# Altium PCB practice_0.PcbDoc
Units mm, origin at the board's own origin, x right, y up, seen from the top; angles counter-clockwise.
Board outline 34.35 x 31.65 mm, 4 copper layers (Top Layer, Int1 (GND), Int2 (GND), Bottom Layer), stack 1.57 mm thick; 34 components, 28 nets, 168 pads, 53 vias.
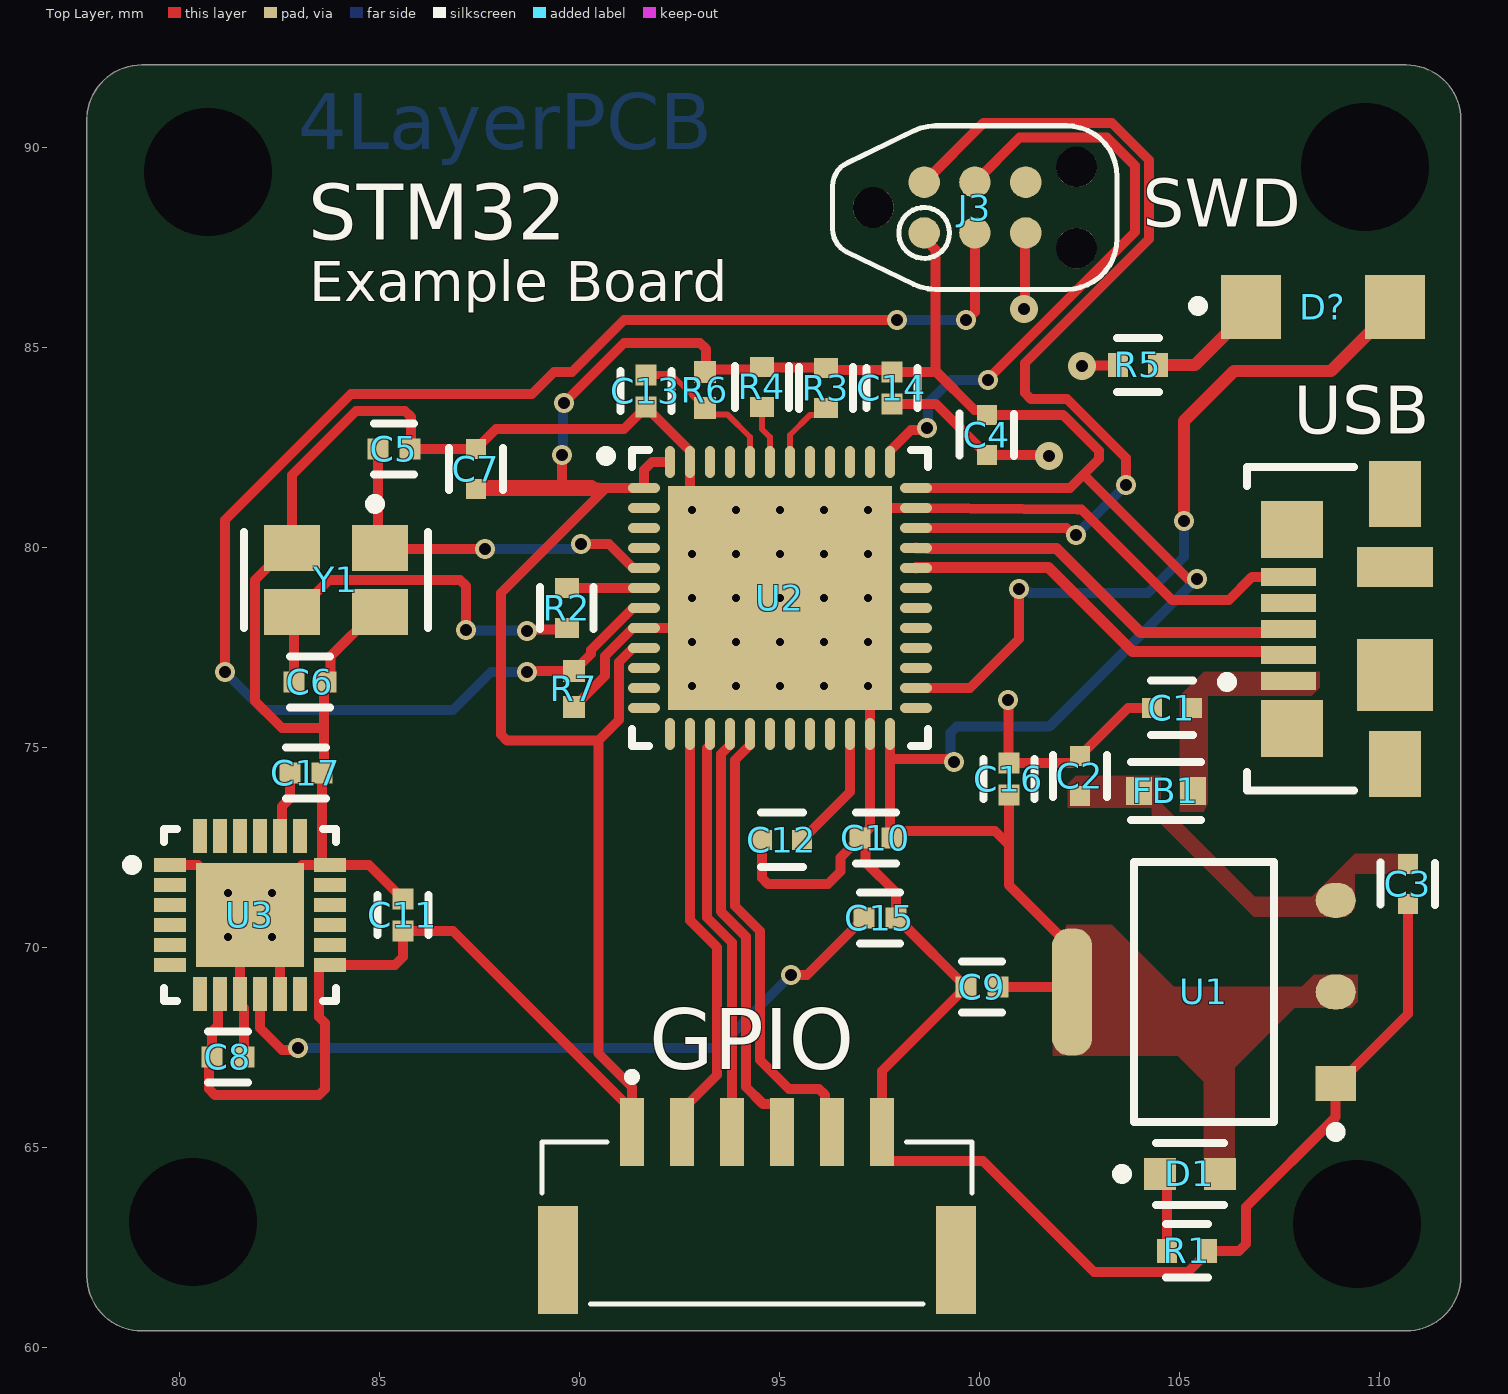
[diagram p0: Top Layer view]
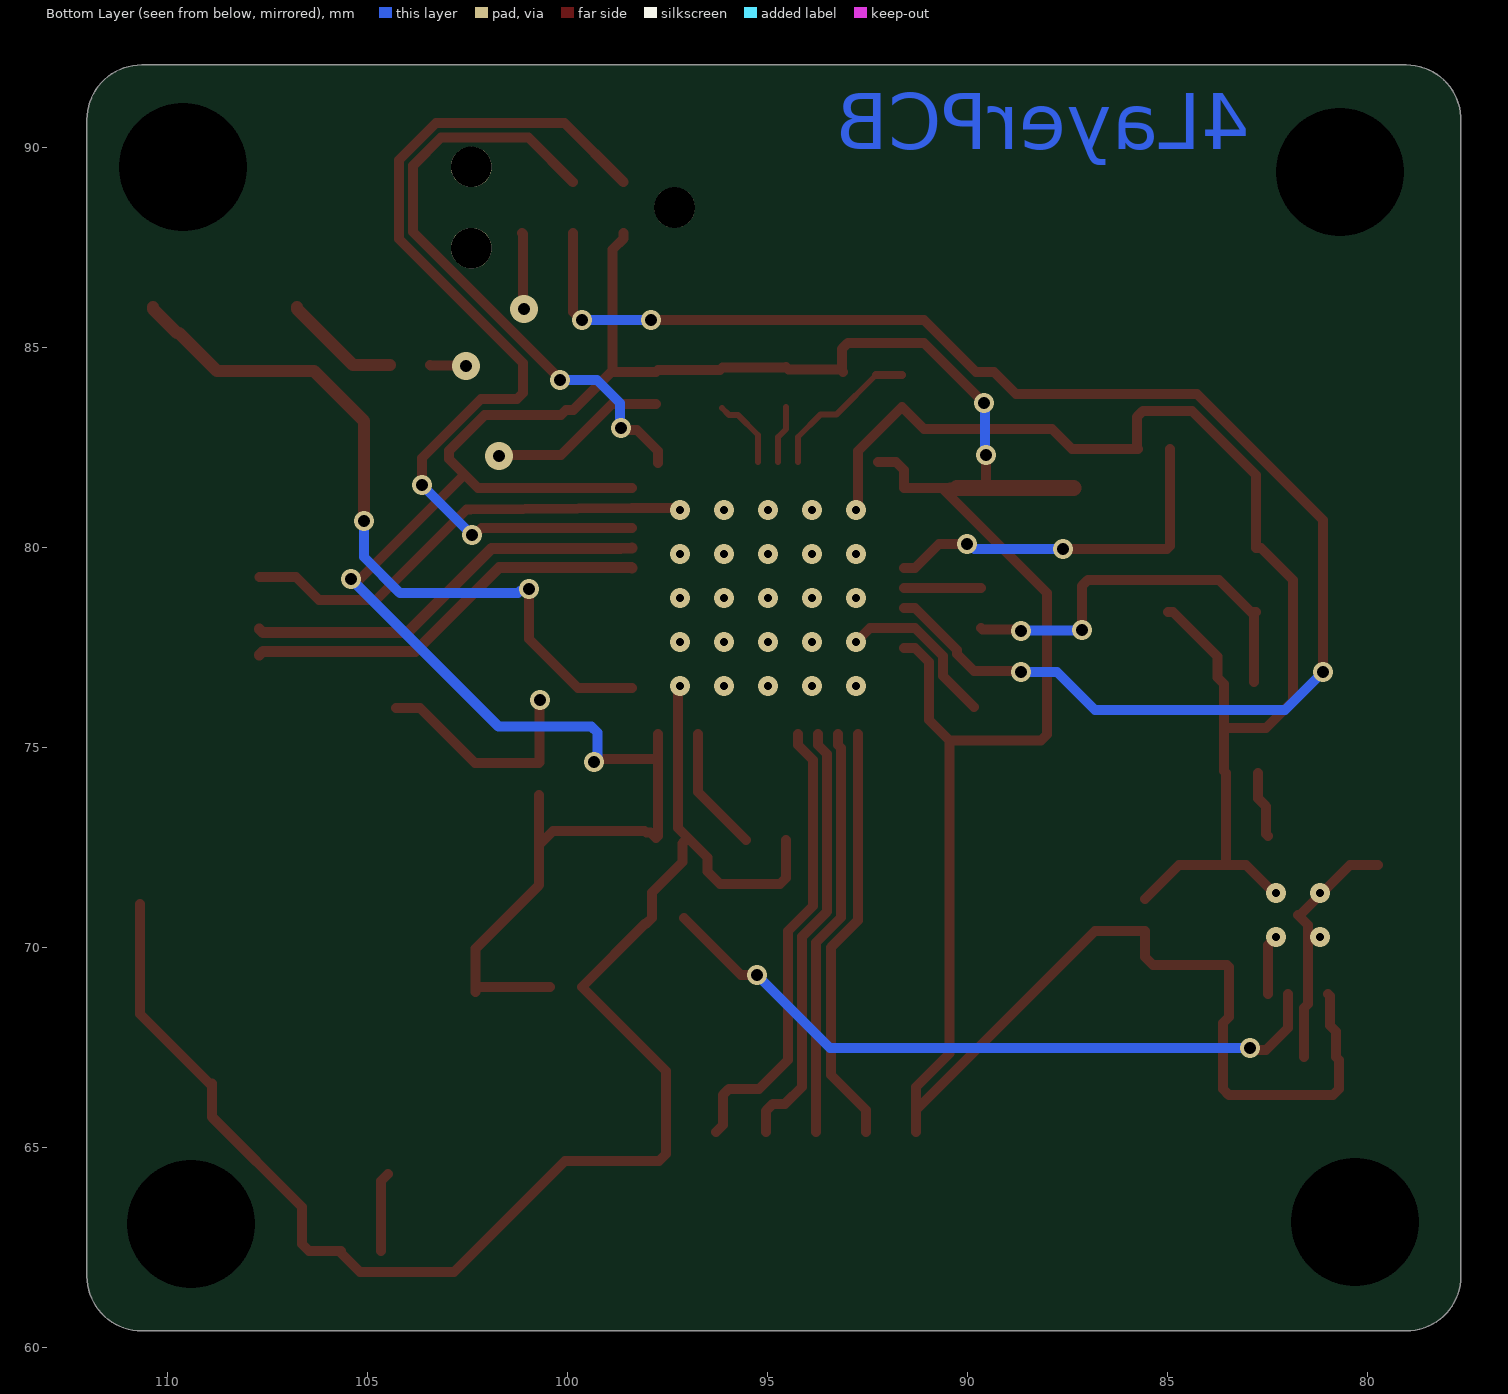
[diagram p1: Bottom Layer view, seen from below]
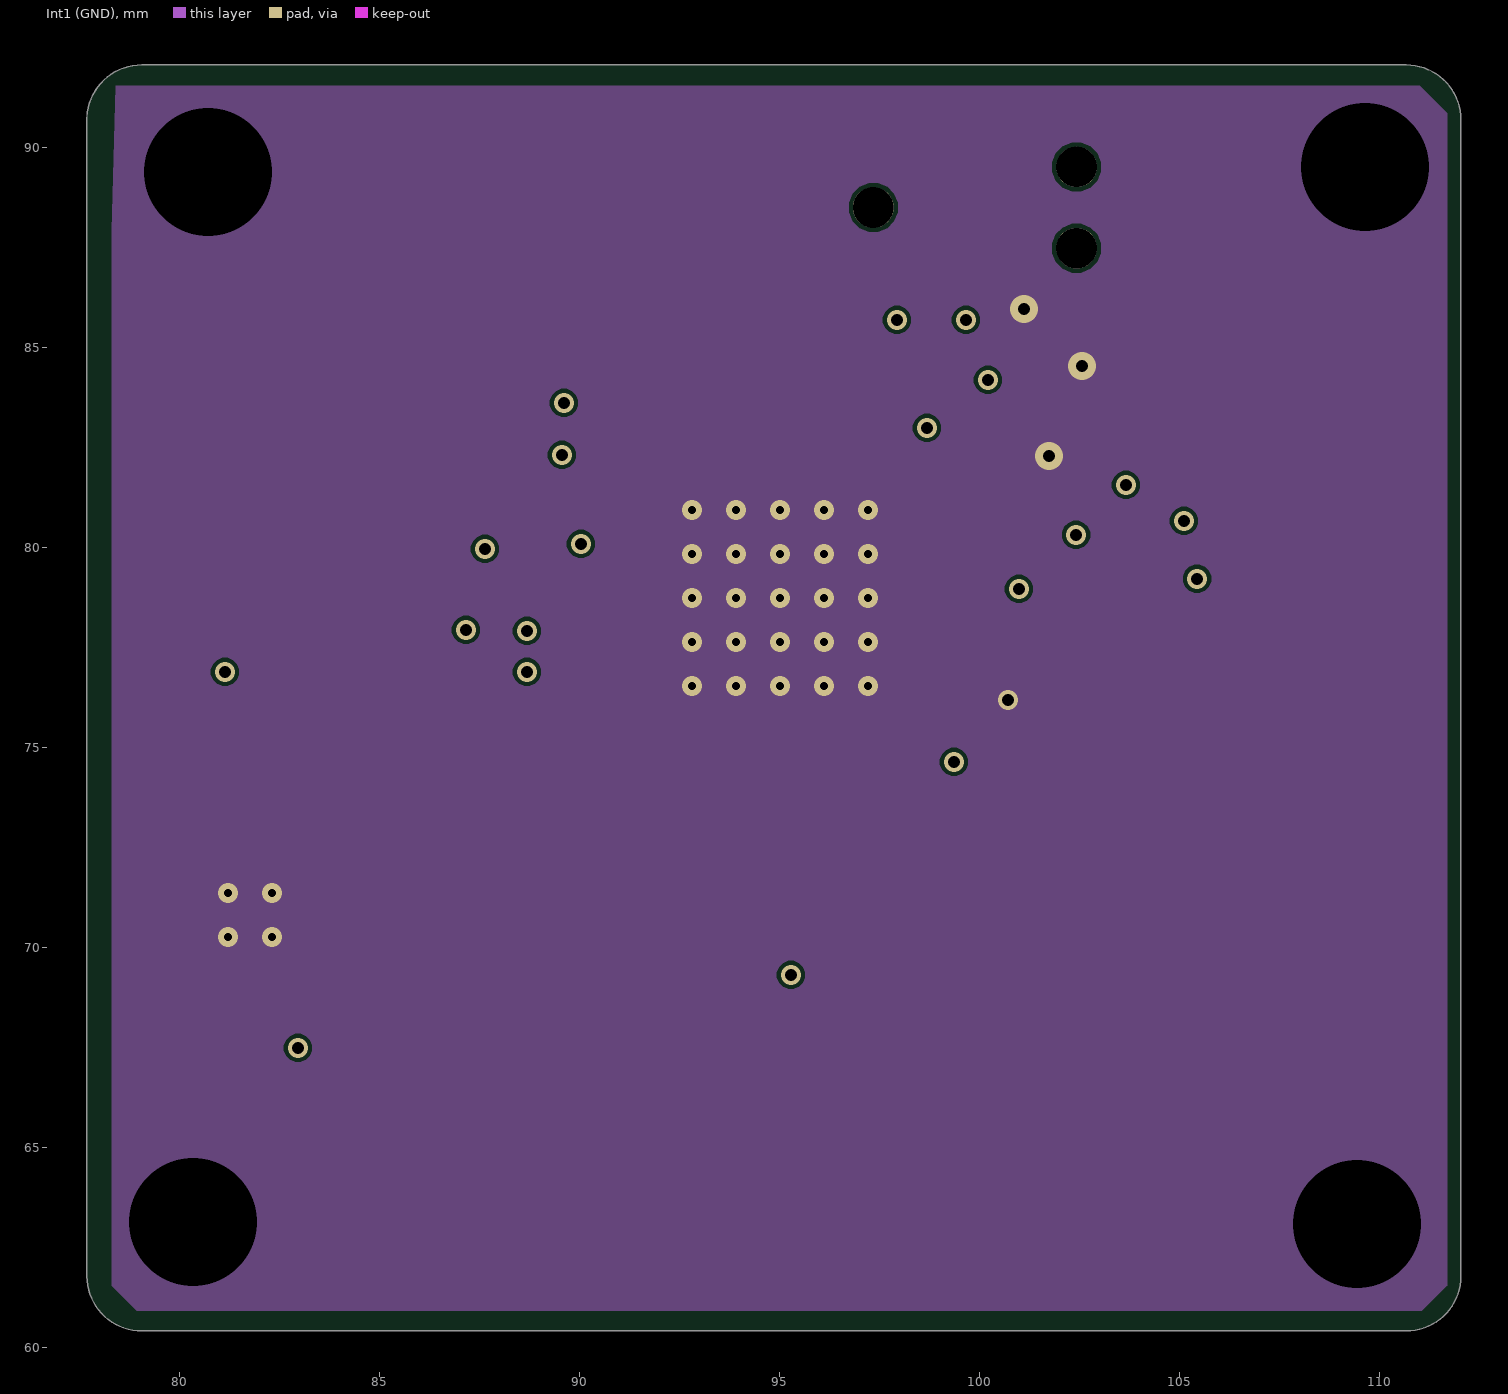
[diagram p2: Int1 (GND)]
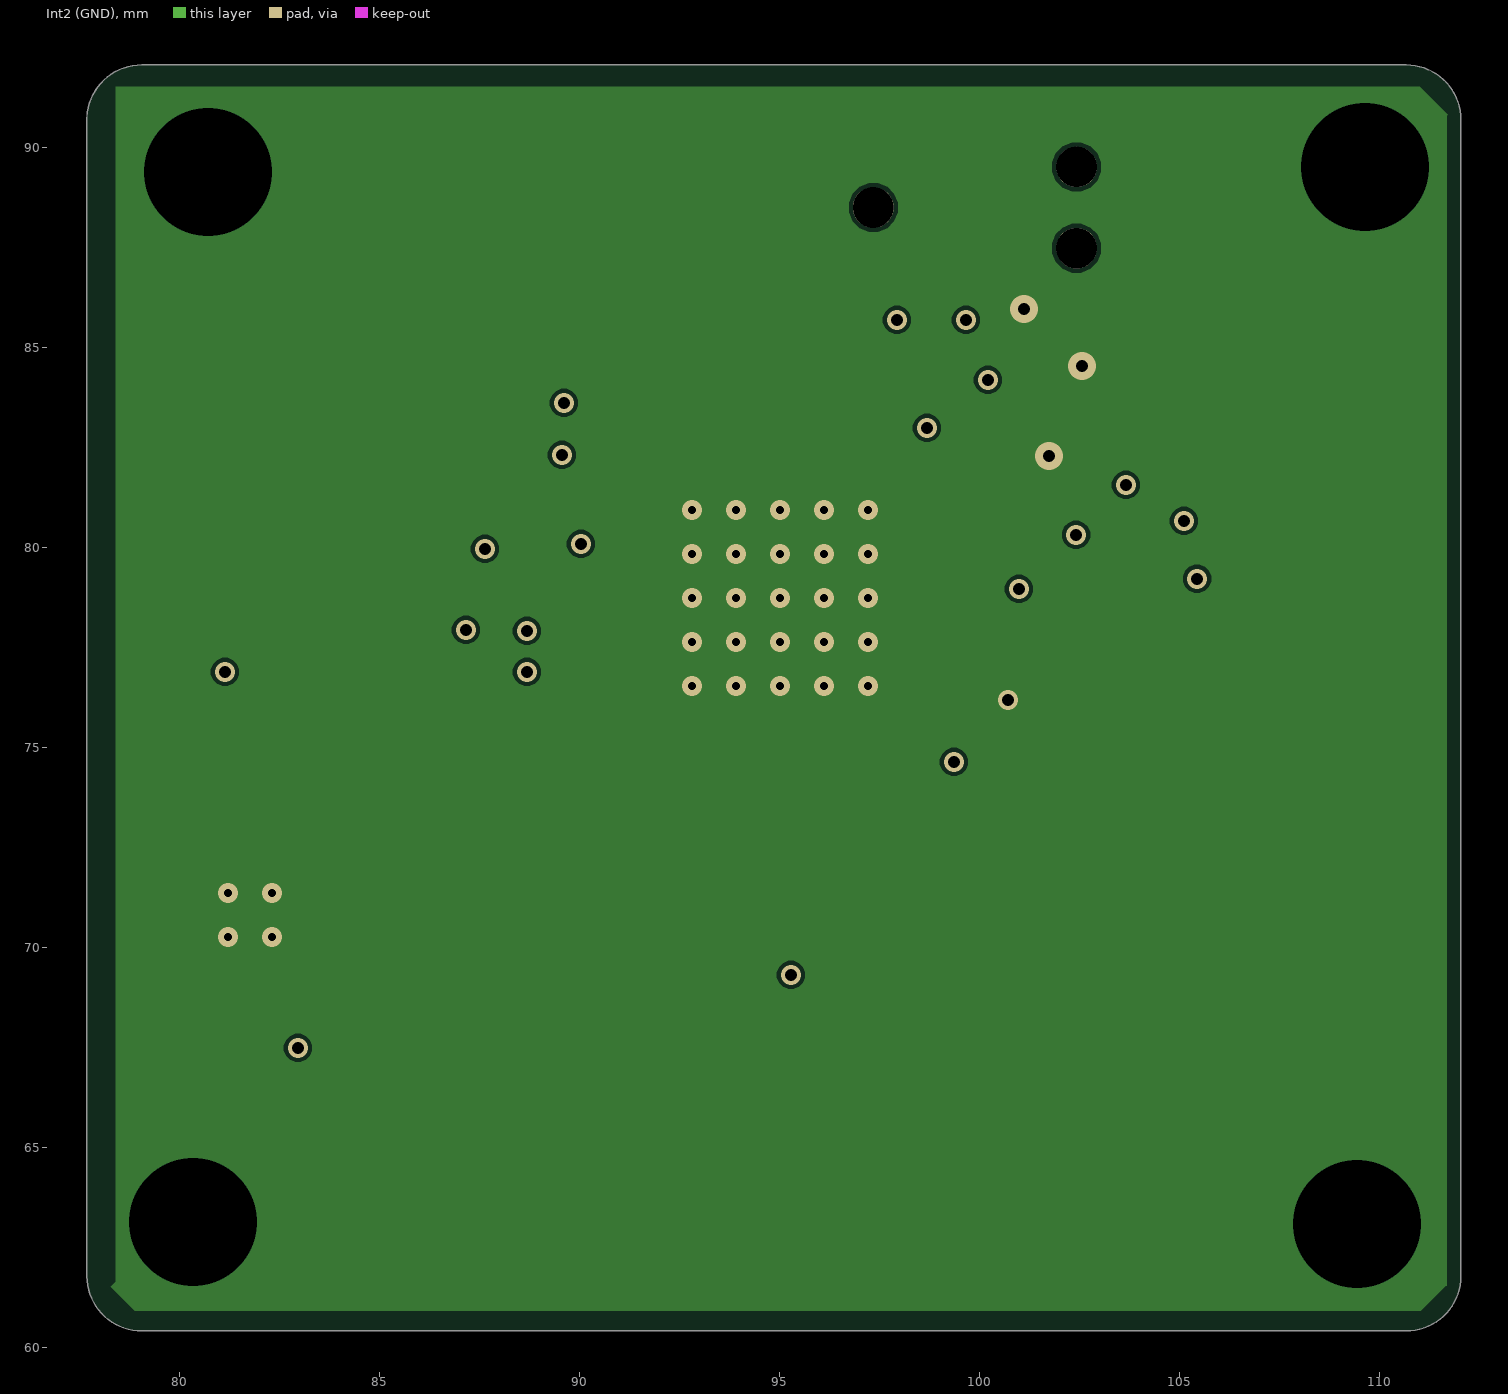
[diagram p3: Int2 (GND)]
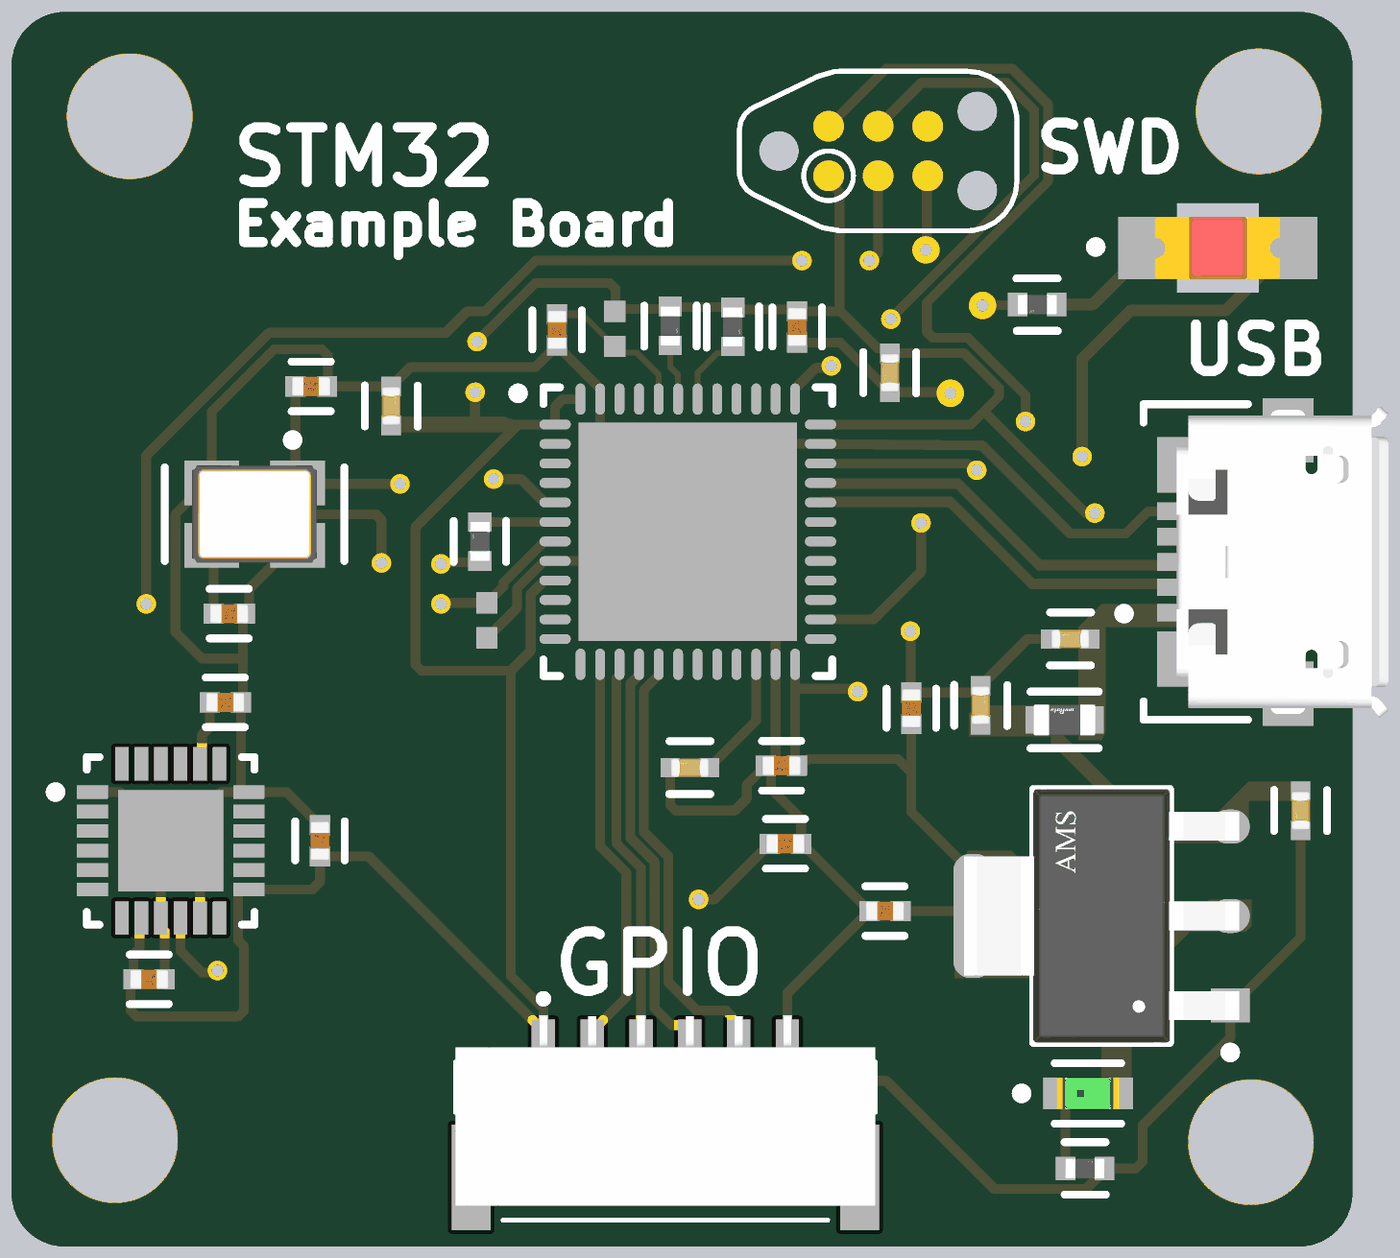
[diagram p4: 3D render of the assembled board from above, using the file's embedded part models]

## Layer stack, top to bottom
Top Solder: solder mask 0.0254, SM-001, Dk 4
Top Layer: signal copper 0.035
Dielectric 1: prepreg 0.2, PP-017, Dk 4.4
Int1 (GND): signal copper 0.0175
Dielectric 2: core 1.065, Core-039, Dk 4.6
Int2 (GND): signal copper 0.0175
Dielectric 3: prepreg 0.2, PP-017, Dk 4.4
Bottom Layer: signal copper 0.035
Bottom Solder: solder mask 0.0254, SM-001, Dk 4

## Board outline
77.675,61.795 ccw(c79.045,61.795) 79.045,60.425 110.655,60.425 ccw(c110.655,61.795) 112.025,61.795 112.025,90.705 ccw(c110.655,90.705) 110.655,92.075 79.045,92.075 ccw(c79.045,90.705) 77.676,90.773 77.675,90.755

## Design rules (kind name [scope] priority, off if disabled: settings)
Clearance [All] p1: gap=0.1 ignorepadtopadclearanceinfootprint=FALSE
DiffPairsRouting [All] p1: maxlimit=0.203 minlimit=0.203 mostfreqgap=0.203 toplayer_mingap=0.203 toplayer_minwidth=0.27 toplayer_maxwidth=0.27 toplayer_prefwidth=0.27 bottomlayer_mingap=0.203 bottomlayer_minwidth=0.27 bottomlayer_maxwidth=0.27 bottomlayer_prefwidth=0.27 impedanceprofiledriven=TRUE impedanceprofileid={82914EE2-84FB-4DEB-938B-AD1E826F180E} impedanceprofilevalue=90.000000 maxuncoupledlength=12.7
HoleSize [All] p1: absolutevalues=TRUE maxlimit=6 minlimit=0.025 maxpercent=80.000 minpercent=20.000
MinimumSolderMaskSliver [All] p1: minsoldermaskwidth=0.05
PolygonConnect [All] p1: connectstyle=Direct reliefconductorwidth=0.254 reliefentries=4 polygonreliefangle="90 Angle" airgapwidth=0.254
RoutingVias [All] p1: holewidth=0.711 width=1.27 viastyle="Through Hole" minholewidth=0.711 minwidth=1.27 maxholewidth=0.711 maxwidth=1.27
SilkToSolderMaskClearance [IsPad] p1: minsilkscreentomaskgap=0.05 clearancetoexposedcopper=TRUE
SolderMaskExpansion [All] p1: expansion=0 istentingtop=FALSE
SupplyNets "Schematic Supply Nets_3" [InNet('VBUS')] p1: voltage=0.000
SupplyNets "Schematic Supply Nets_2" [InNet('+3V3')] p2: voltage=0.000
SupplyNets "Schematic Supply Nets_1" [InNet('GND')] p3: voltage=0.000
SupplyNets "Schematic Supply Nets" [InNet('+5')] p4: voltage=0.000
UnRoutedNet [All] p1: checkbadconnections=TRUE
Width [All] p1: maxlimit=1 minlimit=0.1 preferedwidth=0.3 midlayer1_minwidth=0.254 midlayer1_maxwidth=0.254 midlayer1_prefwidth=0.254 midlayer2_minwidth=0.254 midlayer2_maxwidth=0.254 midlayer2_prefwidth=0.254 bottomlayer_minwidth=0.2 minimp=50.000000 maximp=50.000000 favimp=50.000000
25 further rules are at their usual default settings.

## Classes and differential pairs
differential pair class DIFF_USB: USB_D
differential pair USB_D: +USB_D_P -USB_D_N

## Components (designator, comment, footprint, x,y, rotation, side; value= is the part's Value field where it differs from the comment)
C1 "2u2" FP-CC0402-CC-MFG 104.8,76 r180 top
C2 "2u2" FP-CC0402-CC-MFG 102.5,74.3 r90 top
C3 "22u" FP-CC0402-CC-MFG 110.7,71.6 r270 top
C4 "22u" FP-CC0402-CC-MFG 100.175,82.825 r270 top
C5 "100uf" FP-C0402-BB-MFG 85.35,82.475 r0 top value="330 pF"
C6 "100uf" FP-C0402-BB-MFG 83.25,76.65 r0 top value="330 pF"
C7 "2.2uf" FP-CC0402-CC-MFG 87.4,81.975 r90 top
C8 "100uf" FP-C0402-BB-MFG 81.2,67.275 r0 top value="330 pF"
C9 "100uf" FP-C0402-BB-MFG 100.05,69.025 r180 top value="330 pF"
C10 "100uf" FP-C0402-BB-MFG 97.4,72.75 r180 top value="330 pF"
C11 "100uf" FP-C0402-BB-MFG 85.575,70.825 r90 top value="330 pF"
C12 "2.2uf" FP-CC0402-CC-MFG 95.05,72.7 r180 top
C13 "100uf" FP-C0402-BB-MFG 91.65,83.925 r270 top value="330 pF"
C14 "100nf" FP-C0402-BB-MFG 97.8,84 r270 top value="330 pF"
C15 "100uf" FP-C0402-BB-MFG 97.5,70.75 r0 top value="330 pF"
C16 "100uf" FP-C0402-BB-MFG 100.725,74.225 r90 top value="330 pF"
C17 "100uf" FP-C0402-BB-MFG 83.15,74.375 r0 top value="330 pF"
D1 "G" FP-LTST-C193KGKT-5A-MFG 105.25,64.35 r0 top
D? "R" FP-LTST-C230EKT-MFG 108.575,86.025 r0 top
FB1 "120R" FP-BLM18-0_15-t0_8-MFG 104.65,73.925 r180 top
GPIO "SM06B-GHS-TB" JST_SM06B-GHS-TB 94.425,63.525 r0 top (schematic designator J2)
J3 "SWD" TC2030-IDC-NL 99.875,88.51 r0 top
R1 "1k" FP-CSR0402-MFG 105.175,62.425 r0 top
R2 "" FP-CSR0402-MFG 89.675,78.5 r90 top
R3 "1k" FP-CSR0402-MFG 96.15,84 r270 top
R4 "1k" FP-CSR0402-MFG 94.55,84.025 r270 top
R5 "1k" FP-CSR0402-MFG 103.95,84.575 r180 top
R6 "10k" RESC1005X40X20NL05T10 93.125,83.95 r90 top
R7 "10k" RESC1005X40X20NL05T10 89.85,76.475 r90 top
U1 "AMS1117-3.3" FP-AMS1117-IPC_C 105.6,68.9 r180 top
U2 "STM32F411CEU6" STM-UFQFPN48_L 95,78.75 r0 top
U3 "MPU-6050" IS-QFN-24_V 81.75,70.825 r0 top
USB "473460001" FP-473460001-MFG 110.025,77.975 r90 top (schematic designator J1)
Y1 "24M" FP-TSX-3225-MFG 83.9,79.2 r180 top

## Footprints (in the part's own frame and the unit in brackets; to place one, negate y for a bottom-side part, rotate by r counter-clockwise, add the part's x,y. Pads: shape width x height; smd on the part's side, far side on the other; paste and mask are expansions set on the pad)
FP-473460001-MFG [mm]
  rect 0.45x1.38 smd paste+0 mask+0: 1(-1.3,2.31) 2(-0.65,2.31) 3(0,2.31) 4(0.65,2.31) 5(1.3,2.31)
  rect 1.425x1.55 smd paste+0 mask+0: 6(-2.488,2.225) 7(2.488,2.225)
  rect 1.65x1.3 smd paste+0 mask+0: 8(-3.375,-0.35) 11(3.375,-0.35)
  rect 1.8x1.9 smd paste+0 mask+0: 9(-1.15,-0.35)
  rect 1x1.9 smd paste+0 mask+0: 10(1.55,-0.35)
  silkscreen extent -4.05,0.67 4.05,3.97, body extent -4.3,-2.48 4.3,3.45, height 0.25
FP-AMS1117-IPC_C [mm]
  rect 1.004x0.872 smd paste+0 mask+0: 1(-3.295,2.29)
  rrect100% 1.004x0.872 smd paste+0 mask+0: 2(-3.295,0) 3(-3.295,-2.29)
  rrect87% 1.004x3.182 smd paste+0 mask+0: 4(3.295,0)
  silkscreen extent -3.42,-3.25 1.75,3.62, body extent -3.9,-3.35 3.9,3.35, height 0.25
FP-BLM18-0_15-t0_8-MFG [mm]
  rect 0.65x0.7 smd paste+0 mask+0: 1(-0.675,0) 2(0.675,0)
  silkscreen extent -0.87,-0.72 0.87,0.72, body extent -1.1,-0.58 1.1,0.58, height 0.25
FP-C0402-BB-MFG [mm]
  rect 0.52x0.52 smd paste+0 mask+0: 1(-0.4,0) 2(0.4,0)
  silkscreen extent -0.5,-0.64 0.5,0.64, body extent -0.8,-0.4 0.8,0.4, height 0.25
FP-CC0402-CC-MFG [mm]
  rect 0.5x0.5 smd paste+0 mask+0: 1(-0.5,0) 2(0.5,0)
  silkscreen extent -0.53,-0.68 0.53,0.67, body extent -0.95,-0.55 0.95,0.55, height 0.25
FP-CSR0402-MFG [mm]
  rect 0.5x0.6 smd paste+0 mask+0: 1(-0.5,0) 2(0.5,0)
  silkscreen extent -0.53,-0.67 0.53,0.67, body extent -0.85,-0.4 0.85,0.4, height 0.25
FP-LTST-C193KGKT-5A-MFG [mm]
  rect 0.8x0.8 smd paste+0 mask+0: 1(-0.75,0) 2(0.75,0)
  silkscreen extent -1.82,-0.77 0.85,0.77, body extent -1.25,-0.55 1.25,0.55, height 0.25
FP-LTST-C230EKT-MFG [mm]
  rect 1.5x1.6 smd paste+0 mask+0: 1(-1.8,0) 2(1.8,0)
  silkscreen extent -3.25,-0.1 -3,0.15, body extent -2.65,-0.95 2.65,0.95, height 0.25
FP-TSX-3225-MFG [mm]
  rect 1.4x1.15 smd paste+0 mask+0: 1(-1.1,-0.8) 2(1.1,-0.8) 3(1.1,0.8) 4(-1.1,0.8)
  silkscreen extent -2.3,-2.02 2.3,1.2, body extent -1.9,-1.48 1.9,1.48, height 0.25
IS-QFN-24_V [mm] "QFN, 24-Leads, Body 4x4mm, Pitch 0.5mm, Thermal Pad 2.7x2.6mm"
  rect 0.8x0.35 smd: 1(-2,1.25) 2(-2,0.75) 3(-2,0.25) 4(-2,-0.25) 5(-2,-0.75) 6(-2,-1.25) 13(2,-1.25) 14(2,-0.75) 15(2,-0.25) 16(2,0.25) 17(2,0.75) 18(2,1.25)
  rect 0.35x0.85 smd mask+0.102: 7(-1.25,-1.975) 8(-0.75,-1.975) 9(-0.25,-1.975) 10(0.25,-1.975) 11(0.75,-1.975) 12(1.25,-1.975) 19(1.25,1.975) 20(0.75,1.975) 21(0.25,1.975) 22(-0.25,1.975) 23(-0.75,1.975) 24(-1.25,1.975)
  rect 2.7x2.6 smd: 25(0,0)
  silkscreen extent -3.07,-2.15 2.15,2.15, body extent -2,-2 2,2, height 0.95
JST_SM06B-GHS-TB [mm]
  rect 0.6x1.7 smd paste+0 mask+0.102: 1(-3.125,1.875) 2(-1.875,1.875) 3(-0.625,1.875) 4(0.625,1.875) 5(1.875,1.875) 6(3.125,1.875)
  rect 1x2.7 smd paste+0 mask+0.102: MP1(-4.975,-1.325) MP2(4.975,-1.325)
  silkscreen extent -5.38,-2.42 5.38,3.35, body extent -5.38,-2.05 5.38,2.8, height 4.25
RESC1005X40X20NL05T10 [mm] "Chip Resistor, 2-Leads, Body 1.00x0.50mm, IPC Medium Density"
  rect 0.55x0.55 smd: 1(-0.45,0) 2(0.45,0)
  body extent -0.53,-0.27 0.53,0.28, height 0.4
STM-UFQFPN48_L [mm] "QFN, 48-Leads, Body 7.1x7.1mm, Pitch 0.5mm, Thermal Pad 5.6x5.6mm, IPC High Density"
  oval 0.8x0.25 smd: 1(-3.4,2.75) 2(-3.4,2.25) 3(-3.4,1.75) 4(-3.4,1.25) 5(-3.4,0.75) 6(-3.4,0.25) 7(-3.4,-0.25) 8(-3.4,-0.75) 9(-3.4,-1.25) 10(-3.4,-1.75) 11(-3.4,-2.25) 12(-3.4,-2.75) 25(3.4,-2.75) 26(3.4,-2.25) 27(3.4,-1.75) 28(3.4,-1.25) 29(3.4,-0.75) 30(3.4,-0.25) 31(3.4,0.25) 32(3.4,0.75) 33(3.4,1.25) 34(3.4,1.75) 35(3.4,2.25) 36(3.4,2.75)
  oval 0.25x0.8 smd: 13(-2.75,-3.4) 14(-2.25,-3.4) 15(-1.75,-3.4) 16(-1.25,-3.4) 17(-0.75,-3.4) 18(-0.25,-3.4) 19(0.25,-3.4) 20(0.75,-3.4) 21(1.25,-3.4) 22(1.75,-3.4) 23(2.25,-3.4) 24(2.75,-3.4) 37(2.75,3.4) 38(2.25,3.4) 39(1.75,3.4) 40(1.25,3.4) 41(0.75,3.4) 42(0.25,3.4) 43(-0.25,3.4) 44(-0.75,3.4) 45(-1.25,3.4) 46(-1.75,3.4) 47(-2.25,3.4) 48(-2.75,3.4)
  rect 5.6x5.6 smd: 49(0,0)
  silkscreen extent -4.47,-3.7 3.7,3.7, body extent -3.55,-3.55 3.55,3.55, height 0.6
TC2030-IDC-NL [mil]
  round 31 smd paste-39.37: 1(-50,-25) 2(-50,25) 3(0,-25) 4(0,25) 5(50,-25) 6(50,25)
  round 40 hole 40 unplated: ""(-100,0) ""(100,-40) ""(100,40)
  silkscreen extent -140,-81 140,80

## Part data
C1 C2 C3 C4 C7 C12: library part CMP-03422-000732-3, "CAP CER 2.2UF 16V X5R 0402", Capacitance=2.2uF, Case Code (Imperial)=0402, Case Code (Metric)=1005, Dielectric=X5R, Max Operating Temperature=85°C, Min Operating Temperature=-55°C, Package Quantity=5000, Tolerance=10%, Voltage Rating=16V, Case/Package=0402, Halogen Free="Halogen Free", Height=0.5mm, Lead Free="Lead Free", Length=0.039inch, Mount="Surface Mount", Packaging="Tape and Reel", RoHS Compliant=Yes, Termination=SMD/SMT, Thickness=0.022inch, Voltage Rating (DC)=16V, Weight=2.3E-05oz, Width=0.5mm
C5 C6 C8 C9 C10 C11 C13 C14 C15 C16 C17: library part CMP-1034-01425-3, "Capacitor, Ceramic, 330Pf, 16Vdc, 10-% Tol, 10+% Tol, X7r-Tc Code, -15, 15%-Tc Rohs Compliant: Yes", Capacitance="330 pF", Manufacturer=Kemet, Manufacturer Part Number=C0402C331K4RACTU, Package=C0402-BB, Temperature="-55°C to +125°C", Temperature Characteristic=X7R, Temperature Coefficient=15%, Temperature Range High=+125°C, Temperature Range Low=-55°C, Tolerance=0.1, Voltage Rating="16 V", Automotive=No, Category=Cap, ComponentLink2Description=Datasheet, ComponentLink2URL=https://content.kemet.com/datasheets/KEM_C1002_X7R_SMD.pdf, Device Class L1="Passive Components", Device Class L2=Capacitors, Device Class L3="Ceramic Capacitors", Digikey Description="Capacitor, Ceramic, 330Pf, 16Vdc, 10-% Tol, 10+% Tol, X7r-Tc Code, -15, 15%-Tc Rohs Compliant: Yes", Height=0.55mm, Ipc Land Pattern Name=CAPC10050X50, Lead Free=Yes, Material=Ceramic, Mouser Description="Multilayer Ceramic Capacitors MLCC - SMD/SMT 16volts 330pF X7R 10%", Octopart=https://octopart.com/c0402c331k4ractu-kemet-9139363, RoHS=TRUE
D1: library part CMP-2000-06622-2, "LED GREEN CLEAR CHIP SMD", Case Code (Imperial)=0603, Case Code (Metric)=1608, Color=Green, Forward Current=30mA, Forward Voltage=2.3V, Lens Color=Colorless, Max Operating Temperature=85°C, Min Operating Temperature=-55°C, Package Quantity=3000, Power Dissipation=75mW, Reverse Voltage=5V, Test Current=5mA, Case/Package=0603, Depth=0.8mm, Dominant Wavelength=576.5nm, Height=0.35mm, Illumination Color=Green, Lead Free="Lead Free", Length=1.6mm, Lens Style=Diffused, Lens Transparency=Clear, Luminous Intensity=28mcd, Mount="Surface Mount", Number of Elements=1, Number of LEDs=1, Number of Pins=2, Packaging="Tape and Reel", Power Rating=75mW, Radiation Hardening=No, Viewing Angle=130°, Width=0.8mm
D?: library part CMP-22017-000030-1, "LED RED CLEAR CHIP SMD", Case Code (Imperial)=1206, Case Code (Metric)=3216, Color=Red, Forward Current=30mA, Forward Voltage=2V, Lens Color=Colorless, Max Operating Temperature=85°C, Min Operating Temperature=-55°C, Package Quantity=1, Power Dissipation=100mW, Reverse Voltage=5V, Test Current=10mA, Case/Package=1206, Depth=1.6mm, Dominant Wavelength=621nm, Height=1.1mm, Illumination Color=Red, Lead Free="Lead Free", Length=3.2mm, Lens Style=Diffused, Lens Transparency=Clear, Luminous Intensity=6mcd, Mount="Surface Mount", Number of Elements=1, Number of LEDs=1, Number of Pins=2, Packaging="Tape and Reel", Power Rating=100mW, Radiation Hardening=No, Viewing Angle=130°, Wavelength=630nm, Width=1.6mm
FB1: library part CMP-0686-00380-3, "Chip Ferrite Bead, 0603, 120Ω @ 100MHz, 0.5Ω, 25%, 200mA", Case Code (Imperial)=0603, Case Code (Metric)=1608, Current Rating=200mA, DC Resistance (DCR)=500mR, Max Operating Temperature=125°C, Min Operating Temperature=-55°C, Package Quantity=4000, Test Frequency=100MHz, Tolerance=25%, Case/Package=0603, Core Material=Ferrite, DC Current=200mA, Depth=0.95mm, Height=0.8mm, Impedance=120R, Lead Free="Lead Free", Length=1.6mm, Material=Steel, Max Current Rating=200mA, Max DC Current=200mA, Number of Circuits=1, Number of Lines=1, Number of Pins=2, Packaging="Tape and Reel", Radiation Hardening=No, REACH SVHC="No SVHC", Resistance=500mR, Series=BLM18H, Shielding=Unshielded, Termination=SMD/SMT, Weight=7.1E-05oz, Width=0.8mm
GPIO: "Connector Header Surface Mount, Right Angle 6 position 0.049 (1.25mm)", Package=None, Check_prices=https://www.snapeda.com/parts/SM06B-GHS-TB/JST/view-part/?ref=eda, MF="JST Sales", MP=SM06B-GHS-TB, SnapEDA_Link=https://www.snapeda.com/parts/SM06B-GHS-TB/JST/view-part/?ref=snap
J3: library part TC2030-CTX, "CortexÂ® Plug-Of-Nailsâ„¢ Adapter Cable", Package=None, Availability=Unavailable, MF="Tag-Connect LLC", MP=TC2030-CTX, Price=None, SnapEDA_Link=https://www.snapeda.com/parts/TC2030-CTX/Tag-Connect%20LLC/view-part/225831/?ref=snap
R1 R2 R3 R4 R5: library part CMP-26527-006296-1, "General Purpose Thick Film Chip Resistor, 0402, 0.5Ω, 5%, 200ppm/°C, 0.125W", Max Operating Temperature=155°C, Min Operating Temperature=-55°C, Tolerance=5%, Mount="Surface Mount", Packaging="Tape and Reel", RoHS Compliant=Yes
R6 R7: library part CMP-2002-01682-1, Manufacturer="Vishay BCcomponents", Part Number=TNPW040210K0DEED
U1: library part CMP-209535-000001-1, "LDO Voltage Regulators 1A, 3.3V", Dropout Voltage=1.1V, Manufacturer="Advanced Monolithic Systems", Max Junction Temp=+125°C, Max Power Dissipation=1.2W, Max Supply Voltage=15V, Nominal Supply Current=5mA, Output Current=1A, Output Voltage=3.3V, Package=AMS1117, Temperature="-40°C to +125°C", Temperature Range Low=-40°C, Automotive=No, Category=IC, ComponentLink2Description=Datasheet, ComponentLink2URL=http://www.advanced-monolithic.com/pdf/ds1117.pdf, Device Class L1="Integrated Circuits (ICs)", Device Class L2="Power Management ICs", Device Class L3="Voltage Regulators - Linear", Height=1.8mm, Ipc Land Pattern Name=SOT229P700X180-4, Lead Free=Yes, Manufacturer Part Number=AMS1117-3.3, Number of Outputs=1, Octopart=https://octopart.com/ams1117-3.3-advanced+monolithic+systems-25899300, Output Type=Fixed, RoHS=TRUE, Standoff Height=0.64mm, Temperature Range High=+125°C
U2: library part CMP-0243-00165-1, "ARM Cortex-M4 32-bit MCU+FPU, 512 KB Flash, 128 KB RAM, 36 I/Os, 48-Pin UFQFPN, -40 to 85 degC, Tray", I/Os (High Current)=36, Operating Frequency(F) (Processor speed) (MHz)=100, Package Description=UFQFPN48, Package Reference="48-Pin Ultra Thin Fine Pitch Quad Flat No-Lead, 7 x 7 x 0.6 mm Body, 0.5 mm Pitch, Exposed Pad", Supply Voltage(Vcc) min (V)=1.7, ComponentLink1Description="Manufacturer URL", ComponentLink1URL=http://www.st.com/, ComponentLink2Description=Datasheet, ComponentLink2URL=http://www.st.com/st-web-ui/static/active/en/resource/technical/document/datasheet/DM00115249.pdf, Core="ARM Cortex-M4", DatasheetVersion="Rev. 6", FLASH Size (Prog) (kB)=512, Internal RAM Size (kB)=128, Mounting Technology="Surface Mount", Packing=Tray
U3: library part CMP-1753-00002-2, "3-Axis Gyroscope, Accelerometer and a Digital Motion Processor(TM) (DMP), 2.375 to 3.46 V, -40 to 85 degC, 24-Pin QFN, RoHS, Tape and Reel", Manufacturer=InvenSense, Standard Package=5,000, Category=Sensors,Transducers, Datasheet URL=http://datasheet.octopart.com/MPU-6050-InvenSense-datasheet-14421344.pdf, Datasheet Version="Rev. 3.3, 05/2012", Dynamic Catalog=MPU-6000™Series, Family=Multifunction, Featured Product=MPU-60506-Axis,IntegratedI²CSolution, Manufacturer URL=http://www.invensense.com/, Online Catalog=MPU-6000™Series, Other Names="1428-1007-2 / MPU6050", Output Type=Digital, Sensor Type=MotionTracking, Unit PriceUSD=Digital
USB: library part CMP-2000-05246-2, "CONN RCPT USB2.0 MICRO B SMD R/A", Current Rating=1.8A, Manufacturer=Molex, Package=0, Temperature="-30°C to +85°C", Temperature Range High=+85°C, Temperature Range Low=-30°C, Voltage Rating=30V, Automotive=No, Category=Conn, ComponentLink2Description=Datasheet, ComponentLink2URL=https://www.molex.com/webdocs/datasheets/pdf/en-us/0473460001_IO_CONNECTORS.pdf, Conn Orientation="Right Angle", Contact Material=Gold,Nickel, Device Class L1=Connectors, Device Class L2="USB Connectors", Device Class L3=unset, Digikey Description="CONN RCPT USB2.0 MICRO B SMD R/A", Footprint Url=https://www.molex.com/pdm_docs/sd/473460001_sd.pdf, Height=2.945mm, Is Female=yes, Lead Free=Yes, Manufacturer Part Number=473460001, Number of Contacts=5, Octopart=https://octopart.com/47346-0001-molex-7164928, Pitch=0.65mm, RoHS=TRUE, Shielding=true, Usb Standard="USB 2.0"
Y1: library part CMP-36405-000018-1, "CRYSTAL 24.0000MHZ 9PF SMD", Case/Package=SMD/SMT, ESR (Equivalent Series Resistance)=40R, Frequency=24MHz, Frequency Stability=20ppm, Frequency Tolerance=10ppm, Load Capacitance=9pF, Max Operating Temperature=105°C, Min Operating Temperature=-40°C, Package Quantity=250, Depth=2.5mm, Drive Level=200uW, Height=0.024inch, Lead Free="Lead Free", Length=3.2mm, Mount="Surface Mount", Number of Pins=4, Packaging="Tape and Reel", RoHS Compliant=Yes, Series=TSX-3225, Termination=SMD/SMT, Tolerance=10ppm, Weight=0.000564oz, Width=2.5mm

## Free pads (board coordinates)
  round 1.524 hole 3.2: MH(80.325,63.15) MH(80.7,89.4) MH(109.425,63.1) MH(109.625,89.525)

## Via types
v1: diameter 0.5, hole 0.2, Top Layer to Bottom Layer, 29 vias
v2: diameter 0.5, hole 0.3, Top Layer to Bottom Layer, 21 vias
v3: diameter 0.7, hole 0.3, Top Layer to Bottom Layer, 3 vias

## Nets (pads, with @x,y where several pads share a name; then routed paths per layer and width w, separated by ;. In a path a pad name is that pad's centre, name@x,y a point inside that pad or via, vN(x,y) a via of type N, cw(c..) or ccw(c..) an arc to the next point about the centre after c; other vN are vias at no path point)
+3V3: C4.1 C7.1 C8.1 C9.1 C10.1 C11.1 C14.1 C16.1 D1.2 GPIO.1 J3.1 R3.1 R4.1 R6.2 U1.2 U1.4 U2.1 U2.9 U2.24 U2.36 U2.48 U3.8 U3.13 | length 100.9
  Top Layer w0.25: U3.8 80.95,68.8 80.95,68.06 80.8,67.91 C8.1 80.725,67.2 80.725,66.471 80.871,66.325 83.479,66.325 83.625,66.471 83.625,68.125 83.475,68.275 83.475,69.525 83.525,69.575 U3.13 85.375,69.575 85.575,69.775 C11.1 86.825,70.425 GPIO.1@91.3,65.95 ; 89.525,81.5 89.55,81.525 v2(89.55,82.325) ; v2(89.6,83.625) 91.1,85.125 93.004,85.125 93.15,84.979 R6.2@93.15,84.425 ; 90.45,81.5 90.65,81.5 ; GPIO.1 GPIO.1@91.3,65.95 ; U2.9 91.325,77.5 90.975,77.15 90.975,75.7 90.463,75.188 ; U2.48 91.8,82.15 91.6,81.95 U2.1 90.65,81.5 ; R6.2 R6.2@93.15,84.425 ; U2.24 97.75,74.725 ; U2.36 102.25,81.5 102.588,81.838 ; J3.1 98.605,87.739 98.884,87.46 98.884,84.432 ; v2(99.35,74.65) 99.275,74.725 97.75,74.725 ; C9.1 U1.4@102.18,69.025 ; C16.1 100.725,72.575 ; U1.4 102.305,69.989 100.725,71.569 100.725,72.575 ; v2(105.428,79.228) 105.425,79.225 105.2,79.225 102.588,81.838 ; 90.463,75.188 88.171,75.188 88.025,75.334 88.025,78.875 90.65,81.5 ; 90.463,75.188 90.463,67.362 91.3,66.525 GPIO.1@91.3,65.95 ; R6.2@93.15,84.425 93.187,84.463 94.487,84.463 R4.1 94.563,84.512 96.138,84.512 R3.1 96.2,84.45 97.75,84.45 C14.1 98.884,84.4 98.884,84.432 ; 97.75,74.725 97.75,72.8 C10.1 97.935,72.885 98.041,72.885 98.081,72.925 100.375,72.925 100.725,72.575 ; 98.884,84.432 99.866,83.45 100.05,83.45 C4.1 102.08,83.325 102.974,82.431 102.974,82.224 102.588,81.838
  Top Layer w0.28: 90.275,81.5 90.45,81.5
  Top Layer w0.4: C7.1@87.363,81.5 89.525,81.5 90.275,81.5
  Bottom Layer w0.25: v2(89.55,82.325) 89.575,82.35 89.575,83.6 v2(89.6,83.625) ; v2(99.35,74.65) 99.264,74.736 99.264,75.386 99.41,75.532 101.732,75.532 v2(105.428,79.228)
+5: C2.1 C3.1 FB1.2 U1.3
GND: C1.2 C2.2 C3.2 C4.2 C5.2 C6.2 C7.2 C8.2 C9.2 C10.2 C11.2 C12.2 C13.2 C14.2 C15.2 C16.2 C17.2 GPIO.6 J3.5 pad.MH R1.2 R5.2 R7.1 U1.1 U2.8 U2.23 U2.35 U2.47 U2.49 U3.1 U3.9 U3.11 U3.18 U3.25 USB.5 Y1.2 Y1.4 | length 108.3
  Top Layer w0.25: U3.1 80.45,72.075 81.7,70.825 U3.25 81.5,70.575 U3.9 81.5,68.6 81.6,68.5 C8.2 ; v1(82.3,70.275) 82.5,70.075 U3.11 ; U3.25@82.35,71.375 83.05,72.075 U3.18@83.6,72.075 ; Y1.4 84.875,78.4 83.76,77.285 83.76,76.76 C6.2 83.6,76.6 83.6,75.513 ; C11.2 84.725,72.075 U3.18 U3.18@83.6,72.075 ; R7.1 90.625,76.8 90.625,77.3 91.325,78 U2.8 92.45,78 v1(92.8,77.65) ; v1(92.8,80.95) 92.75,81 U2.47 92.75,82.425 C13.2 91.1,82.975 87.9,82.975 C7.2 C5.2 85.775,82.5 85.775,83.279 85.629,83.425 84.4,83.425 82.8,81.825 Y1.2 82.675,80 81.875,79.2 81.875,76.175 82.55,75.5 83.587,75.5 83.6,75.513 ; C12.2 94.55,71.746 94.696,71.6 96.2,71.6 96.511,71.911 96.511,72.261 C10.2 ; v1(97.2,76.55) 97.25,76.5 U2.23 97.25,73 C10.2 ; v1(97.2,80.95) 97.25,81 U2.35 102.436,80.962 102.539,80.961 104.8,78.7 106.225,78.7 106.796,79.271 107.711,79.271 USB.5 ; C14.2 98.9,83.6 C4.2 101.7,82.325 v3(101.725,82.3) ; v2(100.7,76.2) 100.712,76.188 100.712,74.638 C16.2 102.325,74.625 C2.2 103.7,76 C1.2 ; v3(101.1,85.975) 101.123,85.997 101.123,87.853 J3.5 ; v3(102.55,84.55) 102.562,84.563 103.437,84.563 R5.2 ; U1.1 108.895,65.77 106.65,63.525 106.65,62.6 106.475,62.425 R1.2 105.675,62.375 105.2,61.9 102.85,61.9 100.075,64.675 97.725,64.675 97.55,64.85 GPIO.6 97.55,66.925 C9.2 98.06,70.615 98.035,70.615 C15.2 97.9,71.385 97.135,72.15 97.135,72.615 C10.2 ; U1.1@108.961,66.61 110.7,68.349 C3.2 ; U3.18@83.6,72.075 83.55,72.125 C17.2 83.6,74.425 83.6,75.513
  other v1: 81.2,70.275 81.2,71.375 82.3,71.375 92.8,76.55 93.9,76.55 95,76.55 96.1,76.55 93.9,77.65 95,77.65 96.1,77.65 97.2,77.65 92.8,78.75 93.9,78.75 95,78.75 96.1,78.75 97.2,78.75 92.8,79.85 93.9,79.85 95,79.85 96.1,79.85 97.2,79.85 93.9,80.95 95,80.95 96.1,80.95
IMU_INT: U2.45
IMU_SCL: R3.2 U2.42 | length 1.9
  Top Layer w0.15: U2.42 95.25,82.825 95.753,83.328 95.978,83.328 R3.2
IMU_SDA: R4.2 U2.43 | length 1.5
  Top Layer w0.15: R4.2 94.55,82.97 94.75,82.77 U2.43
Led_Power_K: D1.1 R1.1 | length 2
  Top Layer w0.25: D1.1 104.675,64.175 R1.1
MCU_BOOT_0: C13.1 R6.1 U2.44 | length 3.9
  Top Layer w0.15: 92.3,84.325 93.284,83.341 93.684,83.341 94.25,82.775 U2.44
  Top Layer w0.2: C13.1 92.3,84.325
MCU_NRST: J3.3 R7.2 U2.7 | length 38.8
  Top Layer w0.25: v2@81.125,76.95 81.125,80.7 84.275,83.85 88.8,83.85 89.35,84.4 89.8,84.4 91.1,85.7 v2(97.925,85.7) ; v2@88.675,76.95 88.7,76.925 R7.2 90.275,77.35 90.275,77.45 91.325,78.5 U2.7 ; v2@99.575,85.625 99.6,85.625 99.875,85.9 J3.3
  Bottom Layer w0.25: v2(81.125,76.9) 82.075,75.95 86.825,75.95 87.775,76.9 v2(88.675,76.9) ; v2@97.9,85.675 v2(97.925,85.7) v2(99.65,85.7)
MCU_OSC_IN: C5.1 U2.5 Y1.1 | length 9.4
  Top Layer w0.25: C5.1 84.95,80.05 85.025,79.975 v2(87.625,79.975) ; v2(90.025,80.1) 90.725,80.1 91.325,79.5 U2.5
  Bottom Layer w0.25: v2(87.625,79.975) 89.832,79.975 89.957,80.1 v2(90.025,80.1)
MCU_OSC_OUT: R2.2 U2.6 | length 1.9
  Top Layer w0.25: R2.2 U2.6
MCU_PA4: GPIO.2 U2.14 | length 10.6
  Top Layer w0.25: GPIO.2 92.55,65.95 93.425,66.825 93.425,70.015 92.75,70.69 U2.14
MCU_PA5: GPIO.3 U2.15 | length 10.2
  Top Layer w0.25: U2.15 93.25,75.075 93.175,75 93.175,70.76 93.8,70.135 GPIO.3
MCU_PA6: GPIO.4 U2.16 | length 10.9
  Top Layer w0.25: U2.16 93.75,75.075 93.525,74.85 93.525,70.905 94.15,70.28 94.15,66.525 94.572,66.103 94.875,66.103 95.05,65.928 GPIO.4
MCU_PA7: GPIO.5 U2.17 | length 11.6
  Top Layer w0.25: U2.17 94.25,75.075 93.875,74.7 93.875,71.05 94.5,70.425 94.5,67.2 95.225,66.475 95.979,66.475 96.125,66.329 96.125,65.575 GPIO.5
MCU_SDO: U2.39
MCU_SWCLK: J3.4 U2.37 | length 15.4
  Top Layer w0.25: U2.37@97.75,82.125 97.75,82.425 98.277,82.952 98.627,82.952 v2(98.675,83) ; J3.4 100.989,90.259 103.171,90.259 103.875,89.555 103.875,87.9 v2@100.25,84.275
  Bottom Layer w0.25: v2(98.675,83) 98.7,83.025 98.7,83.625 99.275,84.2 v2(100.2,84.2)
MCU_SWDIO: J3.2 U2.34 | length 23.4
  Top Layer w0.25: U2.34 102.161,80.5 102.334,80.327 v2(102.402,80.327) ; J3.2 100.085,90.625 103.3,90.625 104.225,89.7 104.225,87.725 101.125,84.625 101.125,83.871 101.271,83.725 102.175,83.725 103.65,82.25 v2(103.65,81.575)
  Bottom Layer w0.25: v2(102.402,80.327) v2(103.65,81.575)
MCU_SWO: J3.6
MCU_VCAP1: C12.1 U2.22 | length 3.1
  Top Layer w0.25: C12.1 96.75,73.9 U2.22
NetC6_1: C6.1 R2.1 Y1.3 | length 10.2
  Top Layer w0.25: C6.1 82.85,78.35 Y1.3 82.925,78.4 83.725,79.2 87.004,79.2 87.15,79.054 v2@87.15,77.975 ; v2(88.675,77.925) 88.712,77.962 89.637,77.962 R2.1
  Bottom Layer w0.25: v2(87.15,77.95) 87.163,77.937 88.662,77.937 v2(88.675,77.925)
NetC15_1: C15.1 U3.10 | length 17.4
  Top Layer w0.25: U3.10 82,68 82.55,67.45 v2@82.9,67.45 ; v2@95.325,69.325 95.675,69.325 C15.1
  Bottom Layer w0.25: v2(82.95,67.5) 93.45,67.5 v2(95.275,69.325)
NetC17_1: C17.1 U3.20 | length 1.7
  Top Layer w0.25: U3.20 82.55,72.85 82.55,73.54 82.75,73.74 C17.1
NetD?_1: D?.1 R5.1 | length 3
  Top Layer w0.3: R5.1 105.375,84.575 106.775,85.975 D?.1
NetD?_2: D?.2 U2.26 | length 18.8
  Top Layer w0.25: U2.26 99.75,76.5 100.975,77.725 v2(100.975,78.975)
  Top Layer w0.3: v2(105.1,80.675) 105.1,83.175 106.35,84.425 108.775,84.425 109.725,85.375 109.775,85.375 110.375,85.975 D?.2
  Bottom Layer w0.25: v2(100.975,78.975) 101.023,78.927 101.194,78.927 101.246,78.875 104.204,78.875 105.1,79.771 v2(105.1,80.675)
USB_D_N: U2.32 USB.2 | length 10.2
  Top Layer w0.27: U2.32 98.41,79.51 98.685,79.51 98.688,79.513 101.717,79.513 103.817,77.413 107.627,77.413 USB.2
USB_D_P: U2.33 USB.3 | length 10.2
  Top Layer w0.27: U2.33 98.41,79.99 98.685,79.99 98.688,79.987 101.913,79.987 104.013,77.887 107.627,77.887 USB.3
VBUS: C1.1 FB1.1 USB.1
pads on no net: GPIO.MP1 GPIO.MP2 J3. U2.2 U2.3 U2.4 U2.10 U2.11 U2.12 U2.13 U2.18 U2.19 U2.20 U2.21 U2.25 U2.27 U2.28 U2.29 U2.30 U2.31 U2.38 U2.40 U2.41 U2.46 U3.2 U3.3 U3.4 U3.5 U3.6 U3.7 U3.12 U3.14 U3.15 U3.16 U3.17 U3.19 U3.21 U3.22 U3.23 U3.24 USB.4 USB.6 USB.7 USB.8 USB.9 USB.10 USB.11

## Polygon pours and split planes (outlines as drawn)
+3V3 on Top Layer "+3V3_L01_P006" (solid, pour order 6): 101.825,67.3 104.95,67.3 105.6,66.65 105.6,64.025 105.65,63.975 106.375,63.975 106.375,67 107.875,68.5 109.3,68.5 109.45,68.65 109.45,69.325 108.35,69.325 108.05,69.025 104.85,69.025 103.3,70.575 101.95,70.575 101.8,70.425 101.825,70.4 101.825,67.375
+5 on Top Layer "+5_L01_P005" (solid, pour order 5): 110.95,72.35 109.375,72.35 108.3,71.275 106.875,71.275 104.525,73.625 104.525,74.3 104.3,74.3 104.3,73.325 106.85,70.775 109.175,70.775 109.375,70.975 109.375,71.825 109.4,71.85 110.95,71.85
+5 on Top Layer "+5_L01_P003" (solid, pour order 3): 104.3,74.3 102.4,74.3 102.2,74.1 102.2,73.5 104.3,73.5
VBUS on Top Layer "VBUS_L01_P000" (solid, pour order 0): 105,73.4 105.6,73.4 105.7,73.6 105.7,73.7 105.7,76.3 108.3,76.3 108.5,76.5 108.5,76.9 105.6,76.9 105,76.3
GND on Int1 (GND) "GND_L02_P017" (solid, pour order 17): 78.3,87.922 78.3,90.775 77.95,91.125 78.375,91.55 111,91.55 111.68,90.87 111.68,61.551 111.676,61.551 111.05,60.925 78.925,60.925 78.3,61.55 78.3,91.475 78.4,91.575
GND on Int2 (GND) "GND_L03_P018" (solid, pour order 18): 78.4,91.525 111,91.525 111.7,90.825 111.675,90.8 111.675,61.55 111.65,61.55 111.025,60.925 78.875,60.925 78.275,61.525 78.4,61.65

## Other copper
Bottom Layer:
  text "4LayerPCB" at 82.954,89.971 h1.4

## Silkscreen, mask and mechanical layers (free items; w line width, h text height)
Top Overlay:
  text "STM32" at 83.204,87.704 h1.4
  text "Example Board" at 83.229,86.162 h1
Mechanical 1:
  lines w0.2: 77.775,77.975 77.775,90.755 ; 77.775,78.975 77.775,61.795 ccw(c79.045,61.795) 79.045,60.525 110.655,60.525 ccw(c110.655,61.795) 111.925,61.795 111.925,90.705 ccw(c110.655,90.705) 110.655,91.975 79.045,91.975 ccw(c79.045,90.705) 77.775,90.705